# EAGLE board schematic-version5 - Jingbin (EAGLE 8.6.0)

Size 47 x 28 mm. Coordinates in mm from the lower left corner, seen from the top.
Outline: 0,0 1.5,0 1.5,2 4.5,2 4.5,0 42.5,0 42.5,2 45.5,2 45.5,0 47,0 47,28 45.5,28 45.5,26 42.5,26 42.5,28 4.5,28 4.5,26 1.5,26 1.5,28 0,28 0,0
Copper layers (1*16): Top 0.035mm / dielectric 1.5mm / Bottom 0.035mm
Design rules "default": minimum track width 6mil, minimum drill 0.35mm, track to track 6mil, track to pad 6mil, pad to pad 6mil, via to via 6mil, smd to smd 6mil, copper to edge 40mil, drill to drill 6mil, minimum pad ring 10mil, minimum via ring 8mil, stop-mask expansion 4mil, vias tented up to drill 0mil, thermal gap 10mil

## Footprints (pad centres in the part's own frame; a part is rotated, then mirrored left to right if it is on the bottom)
C1210 = smd 1.6 x 2.7: 1 -1.4,0; 2 1.4,0
C0603 = smd 1.1 x 1: 1 -0.85,0; 2 0.85,0
C1206 = smd 1.6 x 1.8: 1 -1.4,0; 2 1.4,0
MINI2-F3-B = smd 1.22 x 0.85: NEG 0,1.55; POS 0,-1.5
FTDI_DEVICE_SIDE = drill 1.016 pad 1.88 square: P$1 -6.35,0 | drill 1.016 pad 1.88: P$2 -3.81,0; P$3 -1.27,0; P$4 1.27,0; P$5 3.81,0; P$6 6.35,0
XAL4020 = smd 0.98 x 3.7: 1 -1.185,0; 2 1.185,0
SML0603 = smd 0.8 x 0.8: A 0.75,0; C -0.75,0
WIRELESS-NRF24L01 = drill 1 square: 1 -12.7,6.35 | drill 1: 2 -10.16,6.35; 3 -12.7,3.81; 4 -10.16,3.81; 5 -12.7,1.27; 6 -10.16,1.27; 7 -12.7,-1.27; 8 -10.16,-1.27
NX3225GD-CRA-3 = smd 1.5 x 2.7: P$1 0.95,0; P$2 -0.95,0
R0603 = smd 1 x 1.1: 1 -0.85,0; 2 0.85,0
PUSHBUTTON_SMD_SJ = smd 2 x 2: P$1 3,0; P$2 -3,0
SOT23-3 = smd 0.8 x 0.9: 1 -0.95,-1; 2 0.95,-1; 3 0,1.1
TQFP32-08 = smd 1.27 x 0.559: 1 -4.293,2.8; 2 -4.293,2; 3 -4.293,1.2; 4 -4.293,0.4; 5 -4.293,-0.4; 6 -4.293,-1.2; 7 -4.293,-2; 8 -4.293,-2.8; 17 4.293,-2.8; 18 4.293,-2; 19 4.293,-1.2; 20 4.293,-0.4; 21 4.293,0.4; 22 4.293,1.2; 23 4.293,2; 24 4.293,2.8 | smd 0.559 x 1.27: 9 -2.8,-4.293; 10 -2,-4.293; 11 -1.2,-4.293; 12 -0.4,-4.293; 13 0.4,-4.293; 14 1.2,-4.293; 15 2,-4.293; 16 2.8,-4.293; 25 2.8,4.293; 26 2,4.293; 27 1.2,4.293; 28 0.4,4.293; 29 -0.4,4.293; 30 -1.2,4.293; 31 -2,4.293; 32 -2.8,4.293
GY-521 = drill 0.8 pad 1.778 long: ADO -8.89,-6.35; GND -8.89,6.35; INT -8.89,-8.89; SCL -8.89,3.81; SDA -8.89,1.27; VCC -8.89,8.89; XCL -8.89,-3.81; XDA -8.89,-1.27
JST_CONNECTOR_FEMALE = drill 0.889: + 0,1; - 0,-1
SSOP-16GN = smd 0.419 x 1.143: 1 -2.223,-2.667; 2 -1.587,-2.667; 3 -0.953,-2.667; 4 -0.318,-2.667; 5 0.318,-2.667; 6 0.953,-2.667; 7 1.587,-2.667; 8 2.223,-2.667; 9 2.223,2.667; 10 1.587,2.667; 11 0.953,2.667; 12 0.318,2.667; 13 -0.318,2.667; 14 -0.953,2.667; 15 -1.587,2.667; 16 -2.223,2.667

## Placement (x,y rotation side)
C1  100uF  [C1210]  -26.67,26.67 0 top  (outside the outline)
C2  0.056uF  [C0603]  -59.69,38.1 0 top  (outside the outline)
C3  10uF  [C0603]  -24.13,49.53 0 top  (outside the outline)
C4  65pF  [C1206]  -48.26,25.4 0 top  (outside the outline)
C5  22uF  [C0603]  -30.48,49.53 0 top  (outside the outline)
C6  470pF  [C0603]  -17.78,44.45 0 top  (outside the outline)
C7  10pF  [C0603]  -36.83,49.53 0 top  (outside the outline)
C8  0.1uF  [C0603]  -24.13,44.45 0 top  (outside the outline)
C9  0.1uF  [C0603]  -30.48,44.45 0 top  (outside the outline)
C10  0.1uF  [C0603]  -36.83,44.45 0 top  (outside the outline)
C11  0.1uF  [C0603]  -43.18,44.45 0 top  (outside the outline)
C12  8pF  [C0603]  -48.26,49.53 0 top  (outside the outline)
C13  8pF  [C0603]  -53.34,49.53 0 top  (outside the outline)
C14  10uF  [C0603]  -43.18,49.53 0 top  (outside the outline)
C15  0.1uF  [C0603]  -49.53,44.45 0 top  (outside the outline)
D1  DB2W40300L  [MINI2-F3-B]  -34.29,59.69 0 top  (outside the outline)
D2  DB2W40300L  [MINI2-F3-B]  -36.83,59.69 0 top  (outside the outline)
D3  DB2W40300L  [MINI2-F3-B]  -39.37,59.69 0 top  (outside the outline)
D4  DB2W40300L  [MINI2-F3-B]  -41.91,59.69 0 top  (outside the outline)
J2  FTDI_DEVICE  [FTDI_DEVICE_SIDE]  -22.86,59.69 0 top  (outside the outline)
L1  3.3uH  [XAL4020]  -45.72,59.69 0 top  (outside the outline)
LED1  RED  [SML0603]  -50.8,38.1 0 top  (outside the outline)
LED3  YELLOW  [SML0603]  -35.56,38.1 0 top  (outside the outline)
LED4  YELLOW  [SML0603]  -44.45,38.1 0 top  (outside the outline)
M1  WIRELESS-NRF24L01  [WIRELESS-NRF24L01]  -44.45,10.16 0 top  (outside the outline)
Q1  NX3225GD  [NX3225GD-CRA-3]  -15.24,64.77 0 top  (outside the outline)
R1  820  [R0603]  -62.23,54.61 0 top  (outside the outline)
R2  10K  [R0603]  -36.83,54.61 0 top  (outside the outline)
R3  10K  [R0603]  -41.91,54.61 0 top  (outside the outline)
R4  200K  [R0603]  -55.88,44.45 0 top  (outside the outline)
R5  10K  [R0603]  -46.99,54.61 0 top  (outside the outline)
R6  374K  [R0603]  -62.23,44.45 0 top  (outside the outline)
R7  15K  [R0603]  -52.07,54.61 0 top  (outside the outline)
R8  162K  [R0603]  -17.78,49.53 0 top  (outside the outline)
R10  10K  [R0603]  -58.42,49.53 0 top  (outside the outline)
R11  820  [R0603]  -57.15,54.61 0 top  (outside the outline)
R12  820  [R0603]  -63.5,49.53 0 top  (outside the outline)
R13  10K  [R0603]  -16.51,54.61 0 top  (outside the outline)
R14  10K  [R0603]  -21.59,54.61 0 top  (outside the outline)
R15  10K  [R0603]  -26.67,54.61 0 top  (outside the outline)
R16  10K  [R0603]  -31.75,54.61 0 top  (outside the outline)
S2  PUSH_BUTTON  [PUSHBUTTON_SMD_SJ]  -40.64,25.4 0 top  (outside the outline)
T1  NMOS  [SOT23-3]  -49.53,59.69 0 top  (outside the outline)
T2  NMOS  [SOT23-3]  -53.34,59.69 0 top  (outside the outline)
T3  NMOS  [SOT23-3]  -57.15,59.69 0 top  (outside the outline)
T4  NMOS  [SOT23-3]  -60.96,59.69 0 top  (outside the outline)
U1  ATMEGA328P_TQFP  [TQFP32-08]  -17.78,29.21 0 top  (outside the outline)
U2  GY-521MPU6050  [GY-521]  -17.78,11.43 0 top  (outside the outline)
U$1  JST_CONNECTOR_FEMALE  [JST_CONNECTOR_FEMALE]  -53.34,25.4 0 top  (outside the outline)
U$2  LTC3534  [SSOP-16GN]  -33.02,26.67 0 top  (outside the outline)
U$4  JST_CONNECTOR_FEMALE  [JST_CONNECTOR_FEMALE]  -58.42,25.4 0 top  (outside the outline)
U$7  JST_CONNECTOR_FEMALE  [JST_CONNECTOR_FEMALE]  -15.24,38.1 0 top  (outside the outline)
U$10  JST_CONNECTOR_FEMALE  [JST_CONNECTOR_FEMALE]  -20.32,38.1 0 top  (outside the outline)
U$13  JST_CONNECTOR_FEMALE  [JST_CONNECTOR_FEMALE]  -25.4,38.1 0 top  (outside the outline)

## Library data of the parts
C1 C4 C8-C11 = rcl; SPICEPREFIX: C
C2 C3 C5-C7 C12-C15 R2-R8 R10 R13-R16 = resistor
D1-D4 J2 M1 U2 U$1 U$4 U$7 U$10 U$13 = quad
L1 = coilcraft
LED1 LED3 LED4 = led
Q1 = NDK
R1 R11 R12 = rcl; SPICEPREFIX: R
S2 = adafruit
T1-T4 = quad; DATASHEET: http://www.mouser.com/ds/2/196/irlml6244pbf-936666.pdf; MOUSER: 942-IRLML6244TRPBF; URL: http://www.mouser.com/Search/ProductDetail.aspx?R=IRLML6244TRPBFvirtualkey57370000virtualkey942-IRLML6244TRPBF
U1 = quad; PROD_ID: IC-09069
U$2 = LTC3534

## Nets
CE: M1.3 U1.11
CSN: M1.4 U1.12
DEBUG_LED1: R12.2 U1.32
DEBUG_LED2: R11.2 U1.2
DTR: C8.1 J2.P$1
GND: C1.2 C2.2 C3.2 C5.2 C9.2 C10.2 C11.2 C12.2 C13.2 C14.2 C15.2 J2.P$5 J2.P$6 LED1.C LED3.C LED4.C M1.1 R3.1 R8.1 R13.1 R14.1 R15.1 R16.1 S2.P$1 T1.2 T2.2 T3.2 T4.2 U1.3 U1.5 U1.21 U2.GND U$1.- U$2.1 U$2.3 U$2.4 U$2.7 U$2.8 U$2.9 U$2.16
MISO: M1.7 U1.16
MOSI: M1.6 U1.15
N$1: C12.1 Q1.P$1 U1.7
N$2: C8.2 R10.1 S2.P$2 U1.29
N$3: D1.POS T1.3 U$4.-
N$4: C13.1 Q1.P$2 U1.8
N$5: D2.POS T2.3 U$7.-
N$6: D3.POS T3.3 U$10.-
N$7: D4.POS T4.3 U$13.-
N$8: L1.1 U$2.5
N$9: L1.2 U$2.6
N$10: LED1.A R1.2
N$12: LED3.A R12.1
N$13: LED4.A R11.1
N$14: C4.1 R5.1
N$16: C2.1 R4.1 U$2.2
N$18: C4.2 C7.2 R6.1 R7.1 R8.2 U$2.15
N$19: C6.1 C7.1 U$2.14
N$20: C6.2 R7.2
N$25: C11.1 U1.20
PWM1: R13.2 T1.1 U1.1
PWM2: R14.2 T2.1 U1.9
PWM3: R15.2 T3.1 U1.10
PWM4: R16.2 T4.1 U1.13
PWR: C1.1 C3.1 D1.NEG D2.NEG D3.NEG D4.NEG R1.1 R2.2 R4.2 U$1.+ U$2.10 U$2.12 U$2.13 U$4.+ U$7.+ U$10.+ U$13.+
RXD: J2.P$3 U1.30
SCK: M1.5 U1.17
SCL: U1.28 U2.SCL
SDA: U1.27 U2.SDA
TXD: J2.P$2 U1.31
V_BAT: R2.1 R3.2 U1.25
V_REG_OUT: C5.1 C9.1 C10.1 C14.1 C15.1 J2.P$4 M1.2 R5.2 R6.2 R10.2 U1.4 U1.6 U1.18 U2.VCC U$2.11

## Tracks (layer width: path | path; a pad name or v marks a point on that pad's centre or on a via)
CE  (1 unrouted)
CSN  (1 unrouted)
DEBUG_LED1  (1 unrouted)
DEBUG_LED2  (1 unrouted)
DTR  (1 unrouted)
GND  (39 unrouted)
MISO  (1 unrouted)
MOSI  (1 unrouted)
N$1  (2 unrouted)
N$2  (3 unrouted)
N$3  (2 unrouted)
N$4  (2 unrouted)
N$5  (2 unrouted)
N$6  (2 unrouted)
N$7  (2 unrouted)
N$8  (1 unrouted)
N$9  (1 unrouted)
N$10  (1 unrouted)
N$12  (1 unrouted)
N$13  (1 unrouted)
N$14  (1 unrouted)
N$16  (2 unrouted)
N$18  (5 unrouted)
N$19  (2 unrouted)
N$20  (1 unrouted)
N$25  (1 unrouted)
PWM1  (2 unrouted)
PWM2  (2 unrouted)
PWM3  (2 unrouted)
PWM4  (2 unrouted)
PWR  (16 unrouted)
RXD  (1 unrouted)
SCK  (1 unrouted)
SCL  (1 unrouted)
SDA  (1 unrouted)
TXD  (1 unrouted)
V_BAT  (2 unrouted)
V_REG_OUT  (14 unrouted)